# Altium PCB 34.PcbDoc
Units mil, origin at the board's own origin, x right, y up, seen from the top; angles counter-clockwise.
Board outline 669.29 x 669 mil, 2 copper layers (Top Layer, Bottom Layer); 8 components, 5 nets, 18 pads, 4 vias.
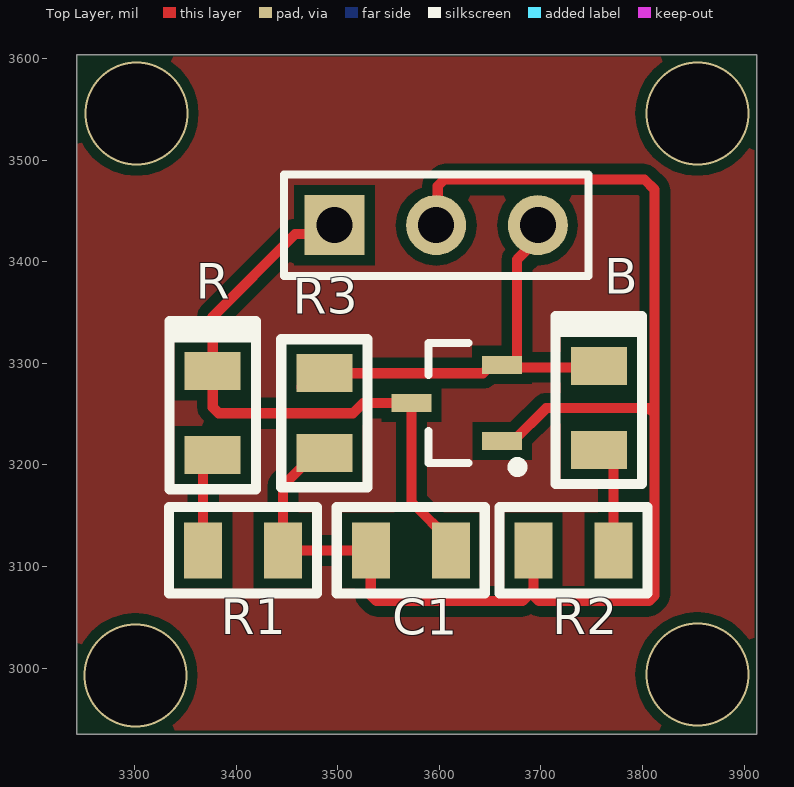
[diagram p0: Top Layer view]
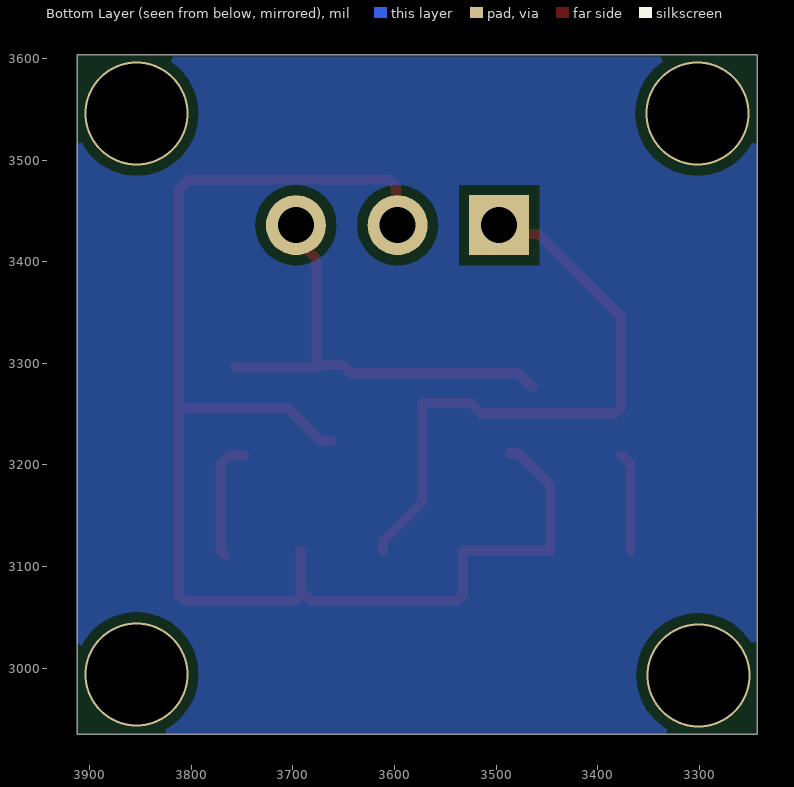
[diagram p1: Bottom Layer view, seen from below]
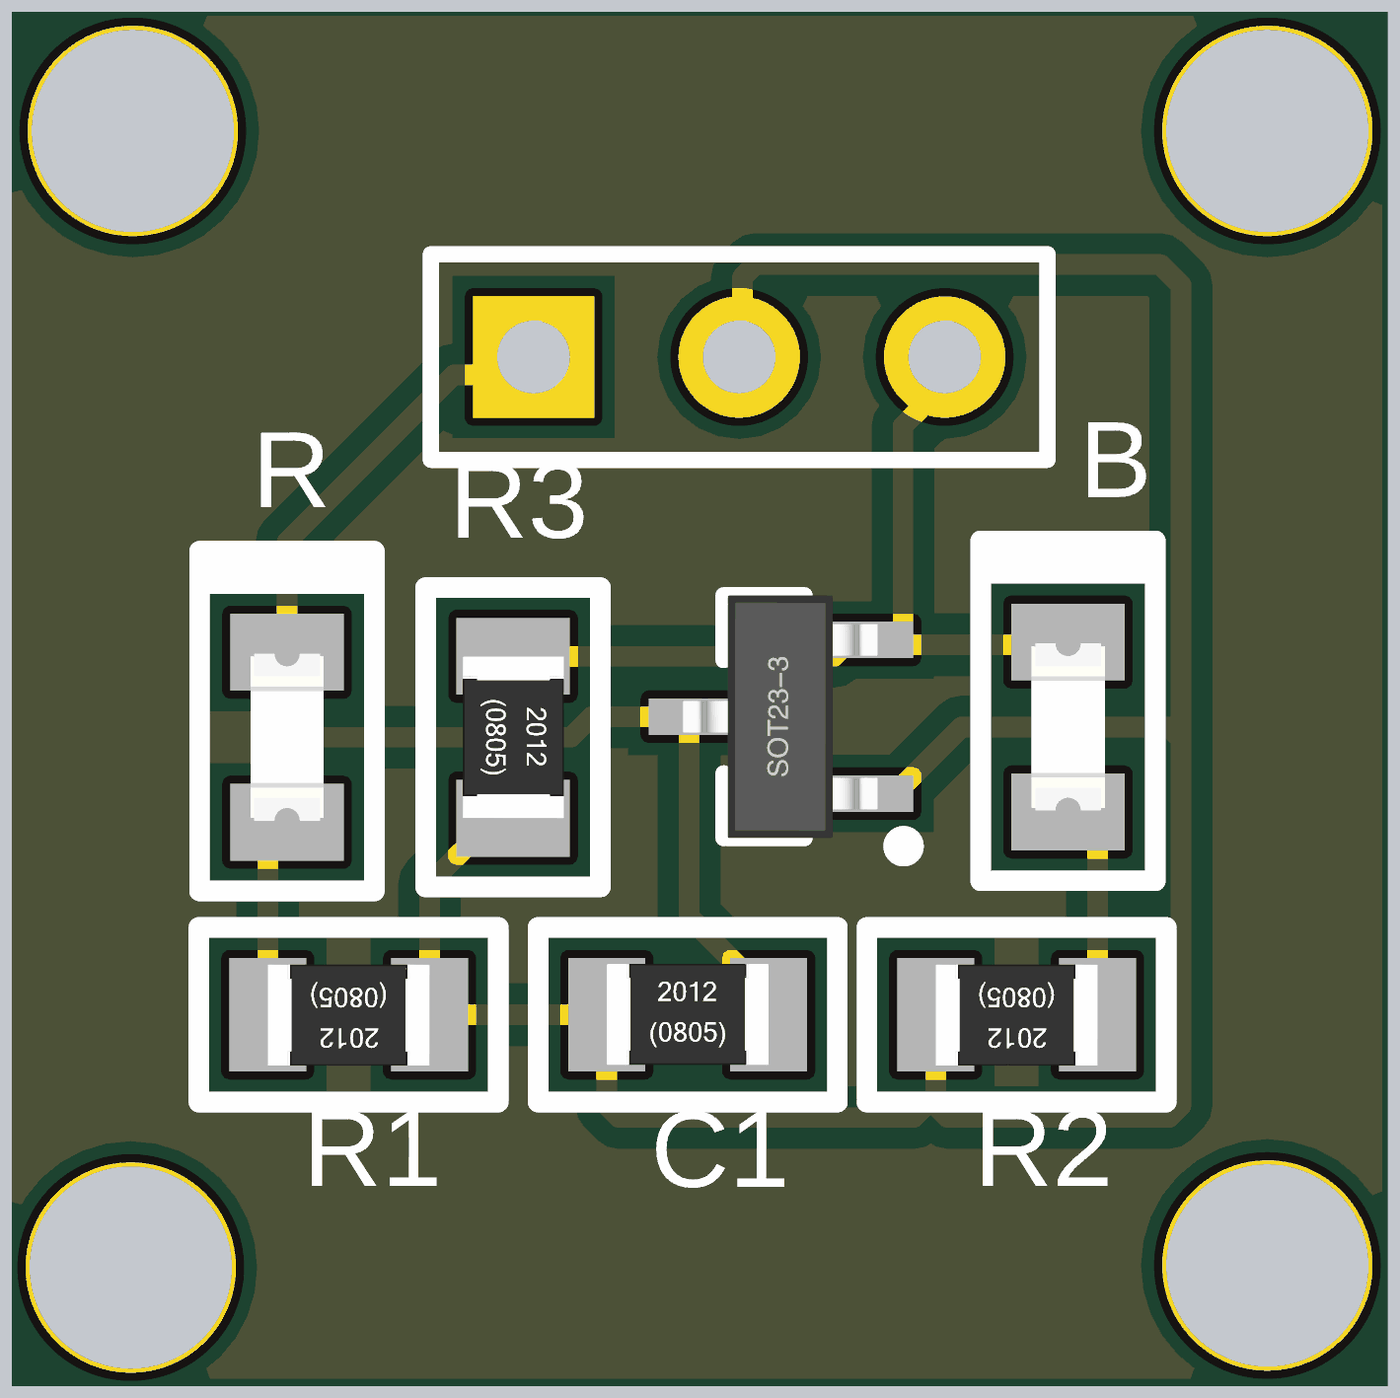
[diagram p2: 3D render of the assembled board from above, using the file's embedded part models]

## Layer stack, top to bottom
Top Solder: solder mask 0.4, Solder Resist, Dk 3.5
Top Layer: signal copper 1.4
Dielectric 1: dielectric 12.6, FR-4, Dk 4.8
Bottom Layer: signal copper 1.4
Bottom Solder: solder mask 0.4, Solder Resist, Dk 3.5

## Board outline
3243.19,2935 3243.19,3604 3912.48,3604 3912.48,2935

## Design rules (kind name [scope] priority, off if disabled: settings)
Clearance [All] p1: gap=10 ignorepadtopadclearanceinfootprint=FALSE except(0: Arc-Hole Track-Hole SMDPad-Hole THPad-Hole Via-Hole Fill-Hole Poly-Hole Region-Hole Text-Hole)
PolygonConnect [All] p1: connectstyle=Relief reliefconductorwidth=10 reliefentries=4 polygonreliefangle="90 Angle" airgapwidth=10
RoutingVias [All] p1: holewidth=28 width=50 viastyle="Through Hole" minholewidth=28 minwidth=50 maxholewidth=28 maxwidth=50
SolderMaskExpansion [All] p1: expansion=4 istentingtop=FALSE
Width [All] p1: maxlimit=10 minlimit=10 preferedwidth=10
30 further rules are at their usual default settings.

## Classes and differential pairs
component class oh34n: C1 oh34n R1 R2 R3

## Components (designator, comment, footprint, x,y, rotation, side; value= is the part's Value field where it differs from the comment)
B "Blue/led" LED-0805 3757,3256 r90 top (schematic designator LED2)
C1 "100nF/50V" 0805 3572,3116 r0 top
P1 "1*3" HDR1X3 3497,3436 r0 top
R "Red/led" LED-0805 3377,3251 r90 top (schematic designator LED1)
R1 "10K/%1" 0805 3407,3116 r180 top
R2 "4.7K/%1" 0805 3732,3116 r180 top
R3 "4.7K/%1" 0805 3487,3251 r270 top
霍尔传感器 "oh34n" SOT23-3L 3617,3261 r90 top

## Footprints (in the part's own frame and the unit in brackets; to place one, negate y for a bottom-side part, rotate by r counter-clockwise, add the part's x,y. Pads: shape width x height; smd on the part's side, far side on the other; paste and mask are expansions set on the pad)
0805 [mm] "SMD, 0805"
  rect 0.95x1.4 smd: 1(-1,0) 2(1,0)
  silkscreen extent -1.85,-1.08 1.85,1.08, body extent -1,-0.62 1,0.63, height 0.45
HDR1X3 [mm] "Connector; Header; 3 Position"
  rect 1.5x1.5 hole 0.9: 1(0,0)
  round 1.5 hole 0.9: 2(2.54,0) 3(5.08,0)
  silkscreen extent -1.27,-1.27 6.35,1.27
LED-0805 [mm] "LED, SMD, 0805"
  rect 0.95x1.4 smd: 1(-1.05,0) 2(1.05,0)
  silkscreen extent -1.9,-1.08 2.3,1.08, body extent -1.03,-0.46 1.03,0.45, height 0.85
SOT23-3L [mm] "3x1.3x1mm(长宽高)    封装库来自淘宝卖家 ID：黄晶宝石"
  rect 0.45x1 smd: 1(-0.95,-1.143) 2(0.95,-1.143) 3(0,1.125)
  silkscreen extent -1.72,-1.65 1.5,0.7, body extent -1.5,-1.2 1.5,1.2, height 1.05

## Part data
B R: library part LED, "LED"
C1: library part Cap, "Capacitor", LatestRevisionDate=17-Jul-2002, LatestRevisionNote="Re-released for DXP Platform.", PackageReference=RAD-0.3, Published=8-Jun-2000, Publisher="Altium Limited"
P1: library part "Header 3", "Header, 3-Pin", LatestRevisionDate=17-Jul-2002, LatestRevisionNote="Re-released for DXP Platform.", Publisher="Altium Limited"
R1 R2 R3: library part Res2, "Resistor", LatestRevisionDate=17-Jul-2002, LatestRevisionNote="Re-released for DXP Platform.", PackageReference=AXIAL-0.4, Published=8-Jun-2000, Publisher="Altium Limited"
霍尔传感器: library part Component_1

## Via types
v1: diameter 102.36, hole 98.43, Top Layer to Bottom Layer, 4 vias

## Nets (pads, with @x,y where several pads share a name; then routed paths per layer and width w, separated by ;. In a path a pad name is that pad's centre, name@x,y a point inside that pad or via, vN(x,y) a via of type N, cw(c..) or ccw(c..) an arc to the next point about the centre after c; other vN are vias at no path point)
GND: C1.2 P1.1 R.2 霍尔传感器.3 | length 609.7
  Top Layer w10: P1.1 3488.33,3427.33 3458.33,3427.33 3377,3346 R.2 3377,3256.86 3382.86,3251 3515.1,3251 3525.1,3261 霍尔传感器.3 3572.71,3163.52 3611.37,3124.86 C1.2
NetLED1_1: R1.2 R.1 | length 97.5
  Top Layer w10: R1.2 3367.63,3200.29 R.1
NetLED2_1: B.1 R2.1 | length 118
  Top Layer w10: B.1@3748.14,3209.66 3762.67,3209.66 3771.37,3200.96 R2.1 R2.1@3767,3111.63
OUT: B.2 P1.3 R3.1 霍尔传感器.2 | length 450.7
  Top Layer w10: R3.1@3464.44,3276.67 3478.14,3290.37 R3.1 3643.14,3290.37 3651.17,3298.4 霍尔传感器.2 霍尔传感器.2@3672.83,3298.4 ; P1.3 3697,3422.73 3676.69,3402.41 3676.69,3302.26 霍尔传感器.2@3672.83,3298.4 ; B.2 3755.66,3296 3675.23,3296 霍尔传感器.2@3672.83,3298.4
VCC: C1.1 P1.2 R1.1 R2.2 R3.2 霍尔传感器.1 | length 1407.8
  Top Layer w10: R3.2 3478.14,3211.63 3446.37,3179.86 R1.1 C1.1 3532.63,3071.86 3538.49,3066 3682,3066 3692.63,3076.63 ; P1.2 3598.53,3437.53 3598.53,3474.67 3604.86,3481 3802,3481 3812,3471 3812,3250.14 ; 霍尔传感器.1 3672.83,3223.6 3705.23,3256 3806.14,3256 3812,3250.14 ; R2.2 3692.63,3076.63 ; 3692.63,3076.63 3692.63,3071.86 3698.49,3066 3806.14,3066 3812,3071.86 3812,3250.14
copper on no net:
  other v1: 3301,2993 3854,2994 3302,3546 3854,3546

## Polygon pours and split planes (outlines as drawn)
no net on Top Layer "NONET_L01_P000" (solid, pour order 0): 3243,3603 3244,3602 3910,3602 3910,2937 3908,2939 3243,2939
no net on Bottom Layer "NONET_L02_P001" (solid, pour order 1): 3243,3602 3911,3602 3913,3600 3913,2935 3247,2935 3244,2938

## Silkscreen, mask and mechanical layers (free items; w line width, h text height)
Mechanical 1:
  the board outline again, w5